# Altium PCB LEDFORJLC.PcbDoc
Units mil, origin at the board's own origin, x right, y up, seen from the top; angles counter-clockwise.
Board outline 2755.7 x 3509.76 mil, 2 copper layers (Top Layer, Bottom Layer); 21 components, 19 nets, 62 pads, 7 vias.
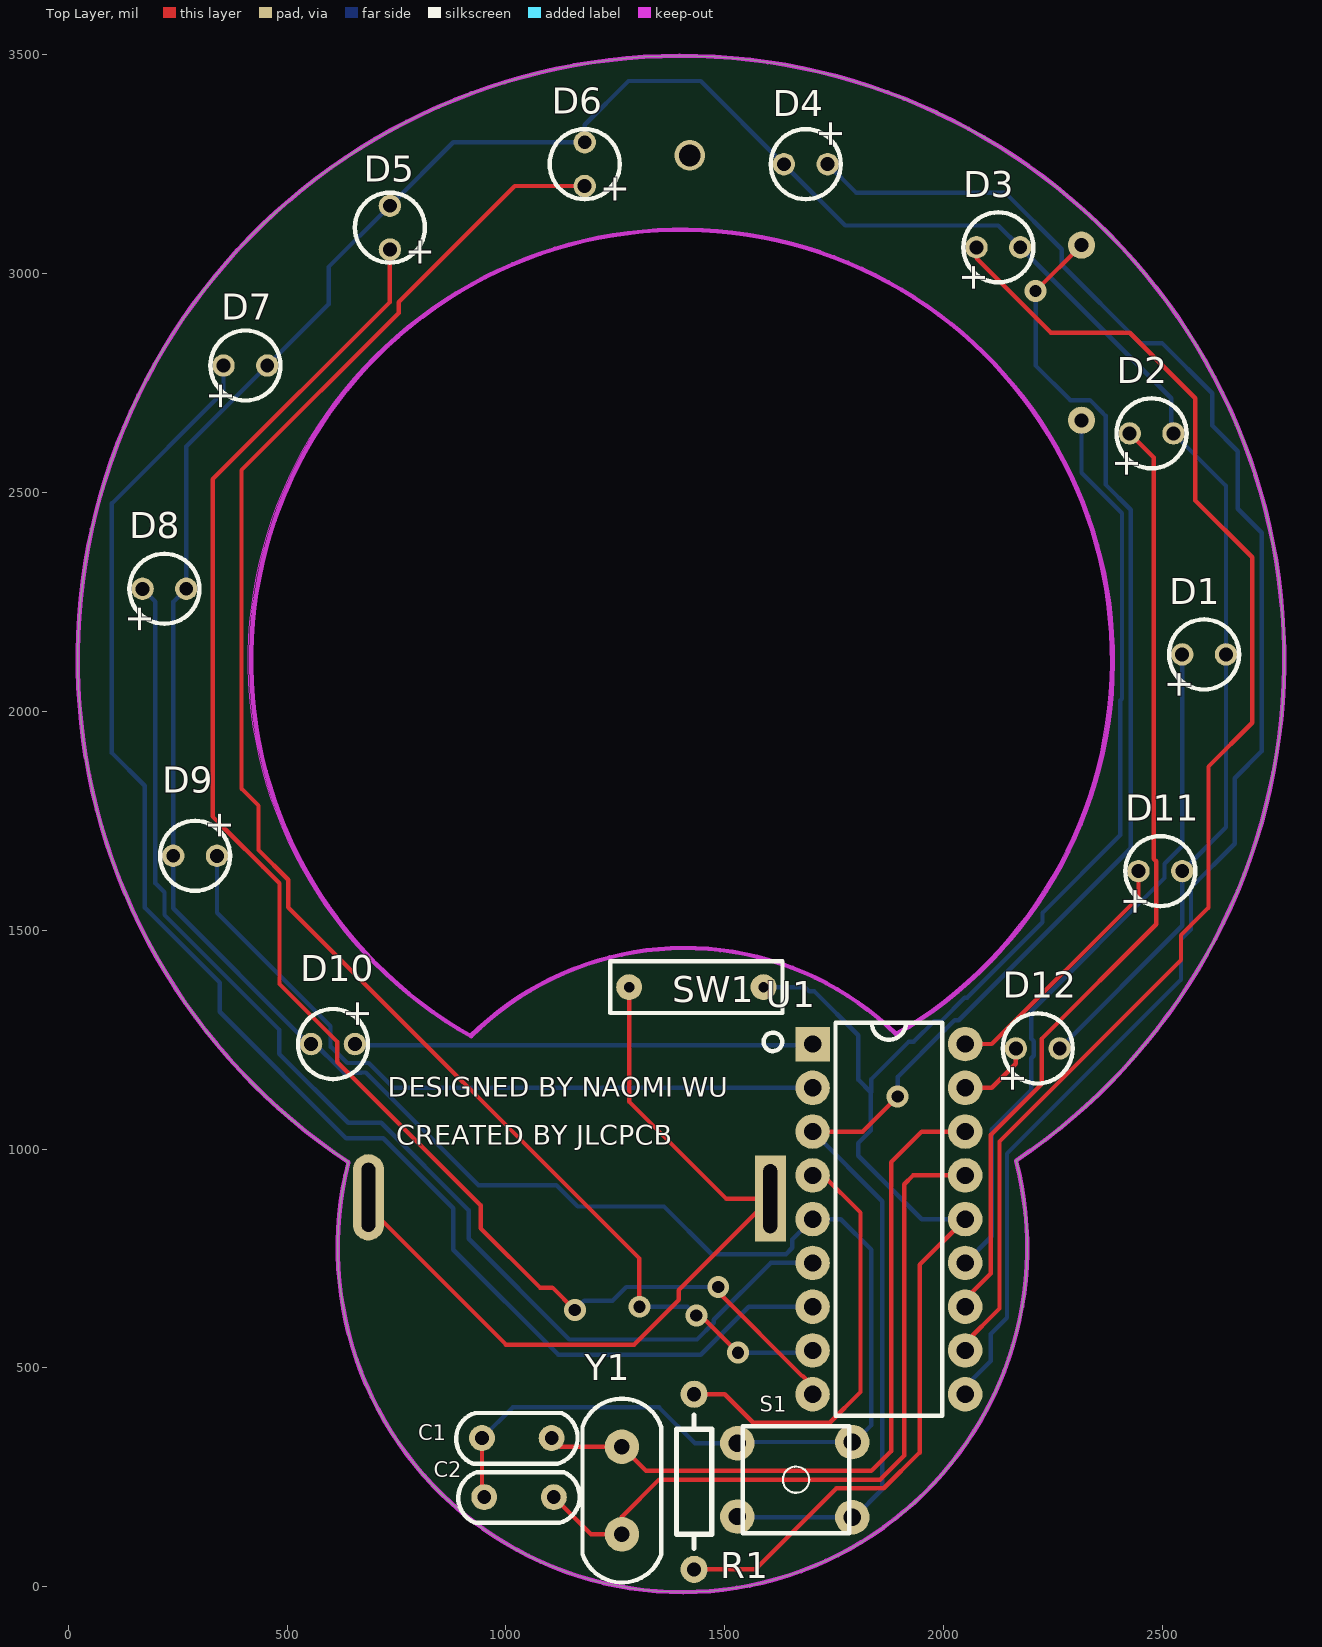
[diagram p0: Top Layer view]
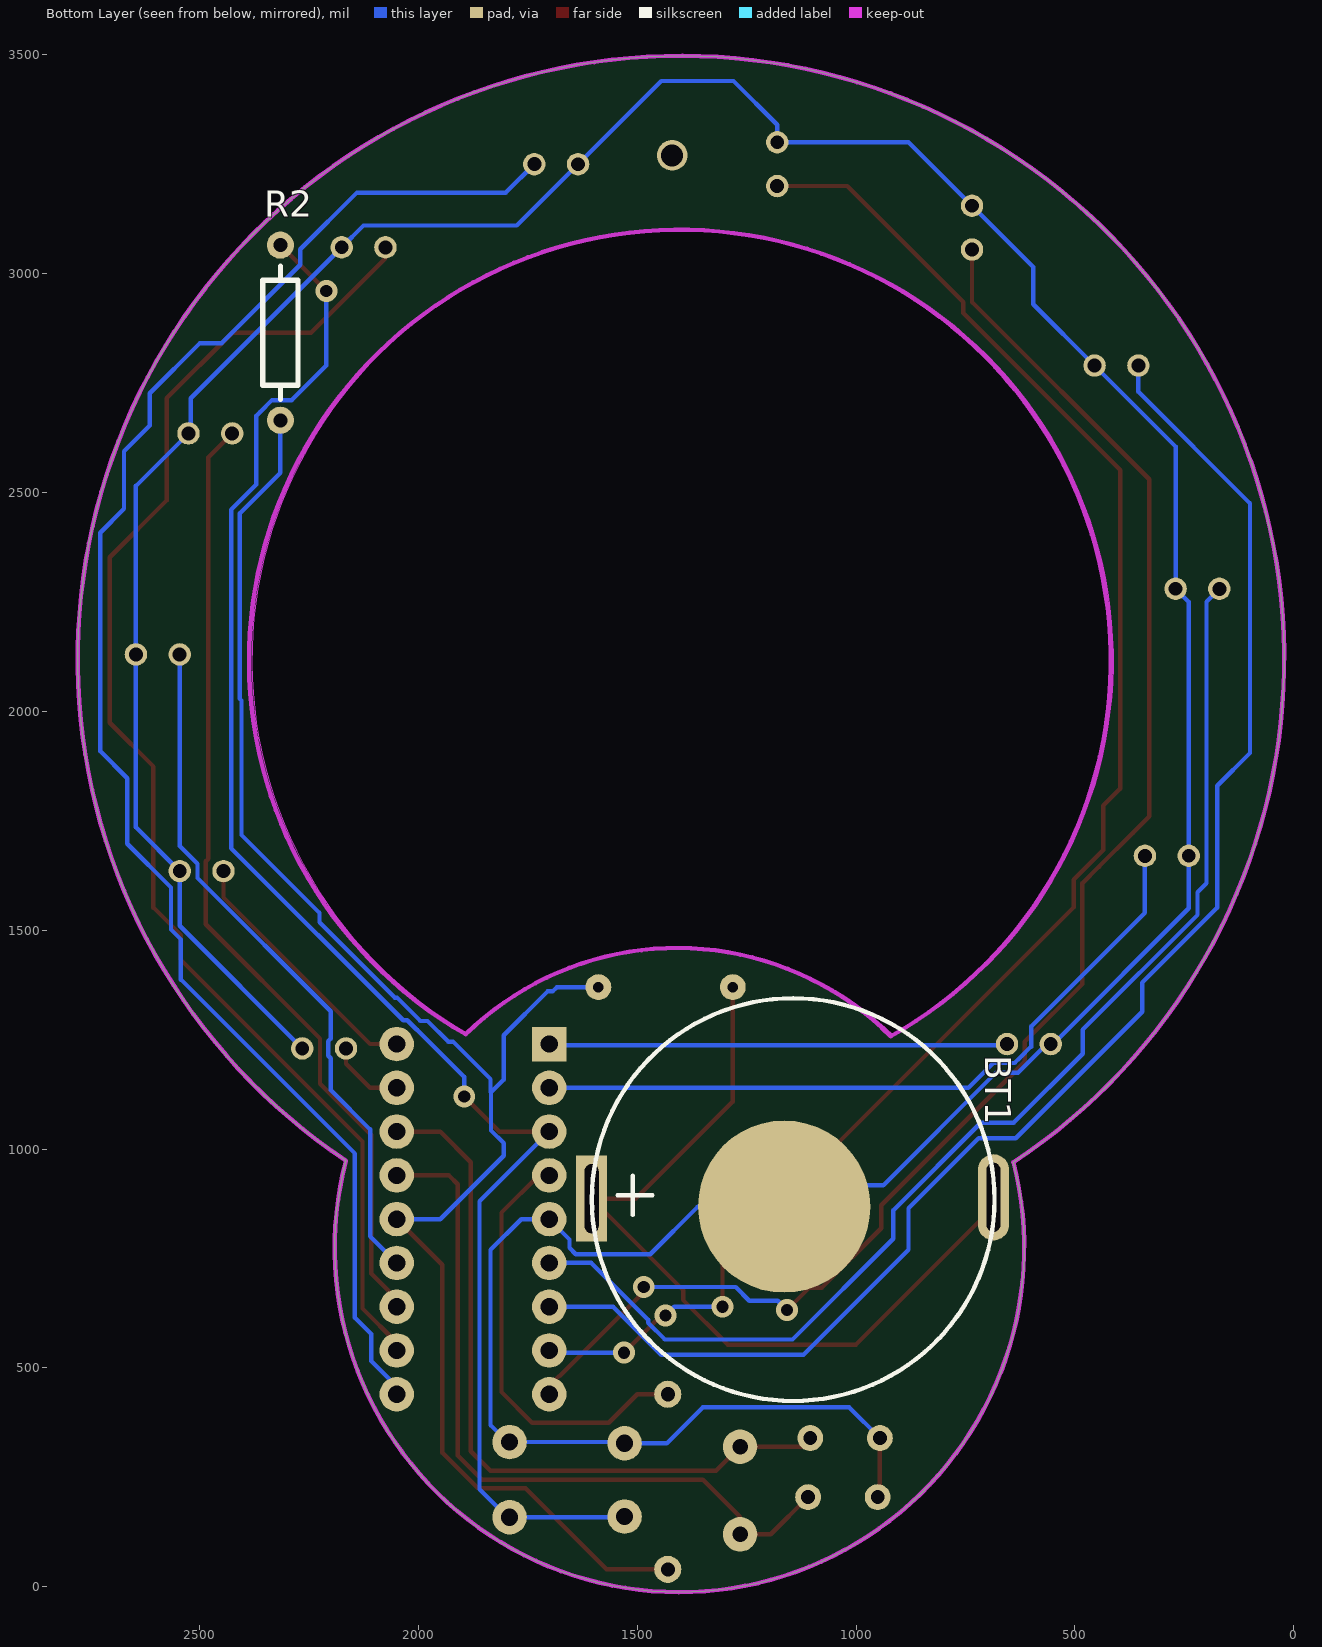
[diagram p1: Bottom Layer view, seen from below]

## Layer stack, top to bottom
Top Layer: signal copper 1.4
Dielectric: dielectric 12.6, FR-4, Dk 4.8
Bottom Layer: signal copper 1.4

## Board outline
640.41,969.88 cw(c1399.93,2119.61) 2165.16,973.67 2165.34,973.72 cw(c1403.37,775.2)
cut-out: 914.1,1258.65 cw(c1395.86,2116.95) 1885.29,1263.01 ccw(c1401.91,769.68)

## Design rules (kind name [scope] priority, off if disabled: settings)
Clearance [All] p1: gap=10
PolygonConnect [All] p1: connectstyle=Relief reliefconductorwidth=10 reliefentries=4 polygonreliefangle="90 Angle"
RoutingVias [All] p1: holewidth=28 width=50 viastyle="Through Hole" minholewidth=28 minwidth=50 maxholewidth=28 maxwidth=50
SilkscreenOverComponentPads [All] p1: minsilkscreentomaskgap=10
SolderMaskExpansion [All] p1: expansion=4
Width [All] p1: maxlimit=10 minlimit=10 preferedwidth=10
27 further rules are at their usual default settings.

## Components (designator, comment, footprint, x,y, rotation, side; value= is the part's Value field where it differs from the comment)
BT1 "BAT" RC2302 1145,879.38 r270 bottom
C1 "CAP" CAP 1025,340 r180 top
C2 "CAP" CAP 1030,205 r180 top
D1 "LED3_R" LED3_R 2595,2130 r0 top
D2 "LED3_R" LED3_R 2475,2635 r0 top
D3 "LED3_R" LED3_R 2125,3060 r0 top
D4 "LED3_R" LED3_R 1685,3250 r180 top
D5 "LED3_R" LED3_R 735,3105 r90 top
D6 "LED3_R" LED3_R 1180,3250 r90 top
D7 "LED3_R" LED3_R 405,2790 r0 top
D8 "LED3_R" LED3_R 220,2280 r0 top
D9 "LED3_R" LED3_R 290,1670 r180 top
D10 "LED3_R" LED3_R 605,1240 r180 top
D11 "LED3_R" LED3_R 2495,1635 r0 top
D12 "LED3_R" LED3_R 2215,1230 r0 top
R1 "RES-DIP" RES-DIP 1430,240 r270 top
R2 "RES-DIP" RES-DIP 2315,2865 r90 bottom
S1 "SW-PB" SW-PB 1660,245 r0 top
SW1 "SW-DIP" SW-DIP 1435,1370 r180 top
U1 "PIC16F84A" PIC16F84A_DIP18 1875,840 r0 top
Y1 "CRYSTAL-C" CRYSTAL-C 1265,220 r270 top

## Footprints (in the part's own frame and the unit in brackets; to place one, negate y for a bottom-side part, rotate by r counter-clockwise, add the part's x,y. Pads: shape width x height; smd on the part's side, far side on the other; paste and mask are expansions set on the pad)
CAP [mm]
  round 1.5 hole 0.8: 1(-2.02,0) 2(2.02,0)
  silkscreen extent -3.52,-1.45 3.52,1.49, body extent -3.49,-0.9 3.51,0.8, height 7.5
CRYSTAL-C [mm]
  round 2 hole 0.9: 1(2.54,0) 2(-2.54,0)
  silkscreen extent -5.33,-2.29 5.33,2.29, body extent -5.63,-2.33 5.72,2.32, height 3.5
LED3_R [mm]
  round 1.3 hole 0.81: 1(-1.27,0)
  round 1.3 hole 0.8: 2(1.27,0)
  silkscreen extent -2.03,-2.03 2.03,2.03, body extent -1.87,-2 1.65,2, height 5.2
PIC16F84A_DIP18 [mm]
  rect 2x2 hole 1: 1(-4.425,10.16)
  round 2 hole 1: 2(-4.425,7.62) 3(-4.425,5.08) 4(-4.425,2.54) 5(-4.425,0) 6(-4.425,-2.54) 7(-4.425,-5.08) 8(-4.425,-7.62) 9(-4.425,-10.16) 10(4.425,-10.16) 11(4.425,-7.62) 12(4.425,-5.08) 13(4.425,-2.54) 14(4.425,0) 15(4.425,2.54) 16(4.425,5.08) 17(4.425,7.62) 18(4.425,10.16)
  silkscreen extent -7.27,-11.4 3.1,11.4, body extent -3.05,-11.43 3.17,11.3, height 2.41
RC2302 [mm]
  oval 5x1.8 hole 0.8 slot 4 at 0 deg: 1(-0.267,11.659)
  rect 5x1.8 hole 0.8 slot 4 at 0 deg: 1(-0.191,-11.659)
  round 10 smd: 2(0.267,-0.483)
  silkscreen extent -11.82,-11.65 11.55,11.72, body extent -11.81,-11.68 10.32,12.48, height 7.66
RES-DIP [mil]
  round 62 hole 32: 1(-200,0) 2(200,0)
  silkscreen extent -152,-40 152,40, body extent -213,-47 213,47, height 101
SW-DIP [mm]
  round 1.5 hole 0.6: 1(-3.9,0) 2(3.9,0)
  silkscreen extent -5,-1.5 5,1.5
SW-PB [mm]
  round 2 hole 1: 1(-3.336,2.107) 1(3.336,2.181) 2(-3.336,-2.142) 2(3.336,-2.181)
  silkscreen extent -3.03,-3.1 3.17,3.09, body extent -4.09,-3.28 4.18,3.22, height 4.3

## Part data
U1: "DIP"

## Free pads (board coordinates)
  round 70 hole 50: 0(1420,3270)

## Via types
v1: diameter 50, hole 28, Top Layer to Bottom Layer, 7 vias

## Nets (pads, with @x,y where several pads share a name; then routed paths per layer and width w, separated by ;. In a path a pad name is that pad's centre, name@x,y a point inside that pad or via, vN(x,y) a via of type N, cw(c..) or ccw(c..) an arc to the next point about the centre after c; other vN are vias at no path point)
3V: R1.2 R2.1 SW1.1 U1.14 | length 3896.7
  Top Layer w10: R1.2 1570,40 1755,225 1863.28,225 1945,306.72 1945,735.79 U1.14
  Bottom Layer w10: SW1.1 1683.27,1370 1693.09,1360.19 1704.81,1360.19 1805,1260 1805,1158.75 1833.75,1130 1833.75,1042.5 1805,1013.75 1805,985 1950,840 U1.14 ; 1835,1130 1835,1160 1920.61,1245.61 1931.77,1245.61 1978.89,1292.72 1995.07,1292.72 2048.46,1346.11 2053.87,1346.11 2225.74,1517.98 2225.74,1539.58 2403.71,1717.54 2403.71,2024.71 2407.53,2028.53 2407.53,2452.47 2315,2545 R2.1
GND: BT1.2 C1.2 C2.2 D1.2 D2.2 D3.2 D4.2 D5.2 D6.2 D7.2 D8.2 D9.2 D10.2 D11.2 D12.2 S1.1 U1.5 | length 9222.3
  Top Layer w10: C2.2@945.47,210 C1.2
  Bottom Layer w10: 669.31,1174.31 630,1174.31 554.31,1250 540,1250 240,1550 240,2250 D8.2 270,2605 D7.2 595,2930 595,3015 D5.2 880,3300 D6.2 1180,3340 1280,3440 1445,3440 D4.2 1775,3110 2125,3110 D3.2 2520,2715 2520,2640 D2.2 2645,2515 D1.2 2645,1735 D11.2 2545,1510 D12.2 ; 670,1175 680,1175 937.5,917.5 1115.36,917.5 BT1.2 1361.14,868.86 1470,760 1640,760 1654.43,774.43 1654.43,793.65 U1.5 1765,840 1835,770 1835,369.5 1796.35,330.85 1791.35,330.85 S1.1@1536.55,330.85 ; C1.2 1015.47,410 1350,410 1432.05,327.95 1528.65,327.95 S1.1@1533.65,327.95
NetBT1_1: BT1.1 SW1.2 | length 1897.5
  Top Layer w10: BT1.1@686,889.9 686,867.48 1000,553.48 1293,553.48 1395,655.48 1395,677.9 1604,886.9 1503.1,886.9 1281.46,1108.54 SW1.2
NetC1_1: C1.1 U1.16 Y1.2 | length 1683.4
  Top Layer w10: C1.1 1124.53,320 Y1.2 1320,265 1835,265 1880,310 1880,970 1950,1040 U1.16
NetC2_1: C2.1 U1.15 Y1.1 | length 1701.2
  Top Layer w10: C2.1 1194.53,120 Y1.1 1265,160 1350,245 1855,245 1910,300 1910,920 1930,940 U1.15
NetD1_1: D1.1 U1.13 | length 1600
  Bottom Layer w10: U1.13 2110,800.79 2110,1045 2200,1135 2200,1207.6 2205.59,1213.19 2205.59,1246.81 2200,1252.4 2200,1315 2504.41,1619.41 2504.41,1651.81 2545,1692.4 D1.1
NetD2_1: D2.1 U1.12 | length 2200.9
  Top Layer w10: U1.12 2049.21,657.54 2107.52,715.85 2107.52,1032.52 2224.41,1149.41 2224.41,1252.4 2485.59,1513.58 2485.59,1657.4 2480,1662.99 2480,2580 D2.1
NetD3_1: D3.1 U1.11 | length 3158
  Top Layer w10: U1.11 2049.21,557.54 2127.52,635.85 2127.52,1017.52 2542.2,1432.2 2542.2,1488.94 2605,1551.73 2605,1873.85 2705,1973.85 2705,2351.78 2575,2481.78 2575,2715 2425,2865 2245,2865 2075,3035 D3.1
NetD4_1: D4.1 U1.10 | length 3729.9
  Bottom Layer w10: D4.1 1800,3185 2140,3185 2269.59,3055.41 2269.59,3020.41 2448.77,2841.23 2498.77,2841.23 2613.35,2726.65 2613.35,2652.91 2672.14,2594.12 2672.14,2462.82 2726.72,2408.24 2726.72,1909.16 2665,1847.44 2665,1697.6 2565,1597.6 2565,1501.72 2542.2,1478.92 2542.2,1387.2 2144.77,989.77 2144.77,614.77 2107.52,577.52 2107.52,515.85 2049.21,457.54 U1.10
NetD5_1: D5.1 U1.9 | length 3634.2
  Top Layer w10: D5.1 735,2935 330,2530 330,1760 368.23,1721.77 444.68,1645.32 482.91,1607.09 482.91,1377.09 614.41,1245.59 614.41,1199.41 942.15,871.67 942.15,819.48 1077.96,683.67 1106.33,683.67 v1(1157.5,632.5) ; v1(1485,685) 1485,673.33 1676.64,481.69 1678.31,481.69 1700.79,459.21 U1.9
  Bottom Layer w10: v1(1157.5,632.5) 1178.67,653.67 1243.67,653.67 1275,685 v1(1485,685)
NetD6_1: D6.1 U1.8 | length 3796.2
  Top Layer w10: D6.1 1020,3200 755,2935 755,2910 396.15,2551.15 396.15,1823.52 435,1784.68 435,1683.28 502.91,1615.38 502.91,1552.09 1305,750 v1(1305,640) ; v1(1435,620) 1445,620 v1(1530,535)
  Bottom Layer w10: v1(1305,640) 1415,640 v1(1435,620) ; v1(1530,535) 1695.79,535 U1.8
NetD7_1: D7.1 U1.7 | length 3464.3
  Bottom Layer w10: D7.1 355,2730 100,2475 100,1905 175,1830 175,1551.72 346.27,1380.45 346.27,1313.73 635,1025 720,1025 880,865 880,770 1120,530 1445,530 1555,640 U1.7
NetD8_1: D8.1 U1.6 | length 2794.9
  Bottom Layer w10: D8.1 199.41,2250.59 199.41,1607.55 220,1586.96 220,1535 481.92,1273.08 481.92,1218.08 640,1060 715,1060 915,860 915,795 1145,565 1436.57,565 1475,603.43 1475,610 1605,740 U1.6
NetD9_1: D9.1 U1.2 | length 1684.2
  Bottom Layer w10: D9.1 340,1540 599.41,1280.59 599.41,1233.19 601.22,1233.19 625,1209.41 637.77,1196.64 686.64,1196.64 743.28,1140 U1.2
NetD10_1: D10.1 U1.1 | length 1067
  Bottom Layer w10: D10.1@640,1250 652.55,1237.45 1698.24,1237.45 U1.1
NetD11_1: D11.1 U1.18 | length 584.5
  Top Layer w10: U1.18@2059.21,1240 2110,1240 2445,1575 D11.1
NetD12_1: D12.1 U1.17 | length 163.6
  Top Layer w10: U1.17@2059.21,1140 2110,1140 2165,1195 D12.1
NetR1_1: R1.1 U1.4 | length 990.3
  Top Layer w10: R1.1 1500,440 1565,375 1740,375 1810,445 1810,855 1725,940 U1.4
NetR2_2: R2.2 S1.2 U1.3 | length 3793.1
  Top Layer w10: U1.3 1815,1040 v1(1895,1120) ; v1(2210,2960) R2.2
  Bottom Layer w10: S1.2@1535.15,159.15 1791.35,159.15 1796.35,159.15 1860,222.8 1860,880.79 U1.3 ; v1(1895,1120) 1895,1165 2002.72,1272.72 2003.36,1272.72 2025.01,1294.37 2034.37,1294.37 2427.53,1687.53 2427.53,2460.75 2370,2518.28 2370,2675 2361,2684 2361,2684.05 2334.05,2711 2289,2711 2210,2790 v1(2210,2960)

## Keep-outs
Keep-Out Layer:
  lines w10: 920.57,1257.85 cw(c1402.32,2116.14) 1891.75,1262.2 ccw(c1408.37,768.88) 920.58,1257.84 ; 2165.16,973.67 ccw(c1399.93,2119.61) 640.41,969.88 ccw(c1403.37,775.2) 2165.34,973.72

## Silkscreen, mask and mechanical layers (free items; w line width, h text height)
Top Overlay:
  text "DESIGNED BY NAOMI WU" at 730,1120 h45
  text "CREATED BY JLCPCB" at 750,1010 h45

## Text inside footprints (layer, text, board x,y; h text height)
D1: Top Overlay "+" at 2564.5,2026 h60 r90
D2: Top Overlay "+" at 2444.5,2531 h60 r90
D3: Top Overlay "+" at 2094.5,2956 h60 r90
D4: Top Overlay "+" at 1715.5,3354 h60 r270
D5: Top Overlay "+" at 839,3074.5 h60 r180
D6: Top Overlay "+" at 1284,3219.5 h60 r180
D7: Top Overlay "+" at 374.5,2686 h60 r90
D8: Top Overlay "+" at 189.5,2176 h60 r90
D9: Top Overlay "+" at 320.5,1774 h60 r270
D10: Top Overlay "+" at 635.5,1344 h60 r270
D11: Top Overlay "+" at 2464.5,1531 h60 r90
D12: Top Overlay "+" at 2184.5,1126 h60 r90